# Altium PCB Tray2.PcbDoc (part 3 of 6)
Units mil, origin at the board's own origin, x right, y up, seen from the top; angles counter-clockwise.
Board outline 6000 x 4000 mil, 2 copper layers (Top Layer, Bottom Layer); 418 components, 415 nets, 1799 pads, 870 vias.
Unrouted connection lines stored in the file: 363.
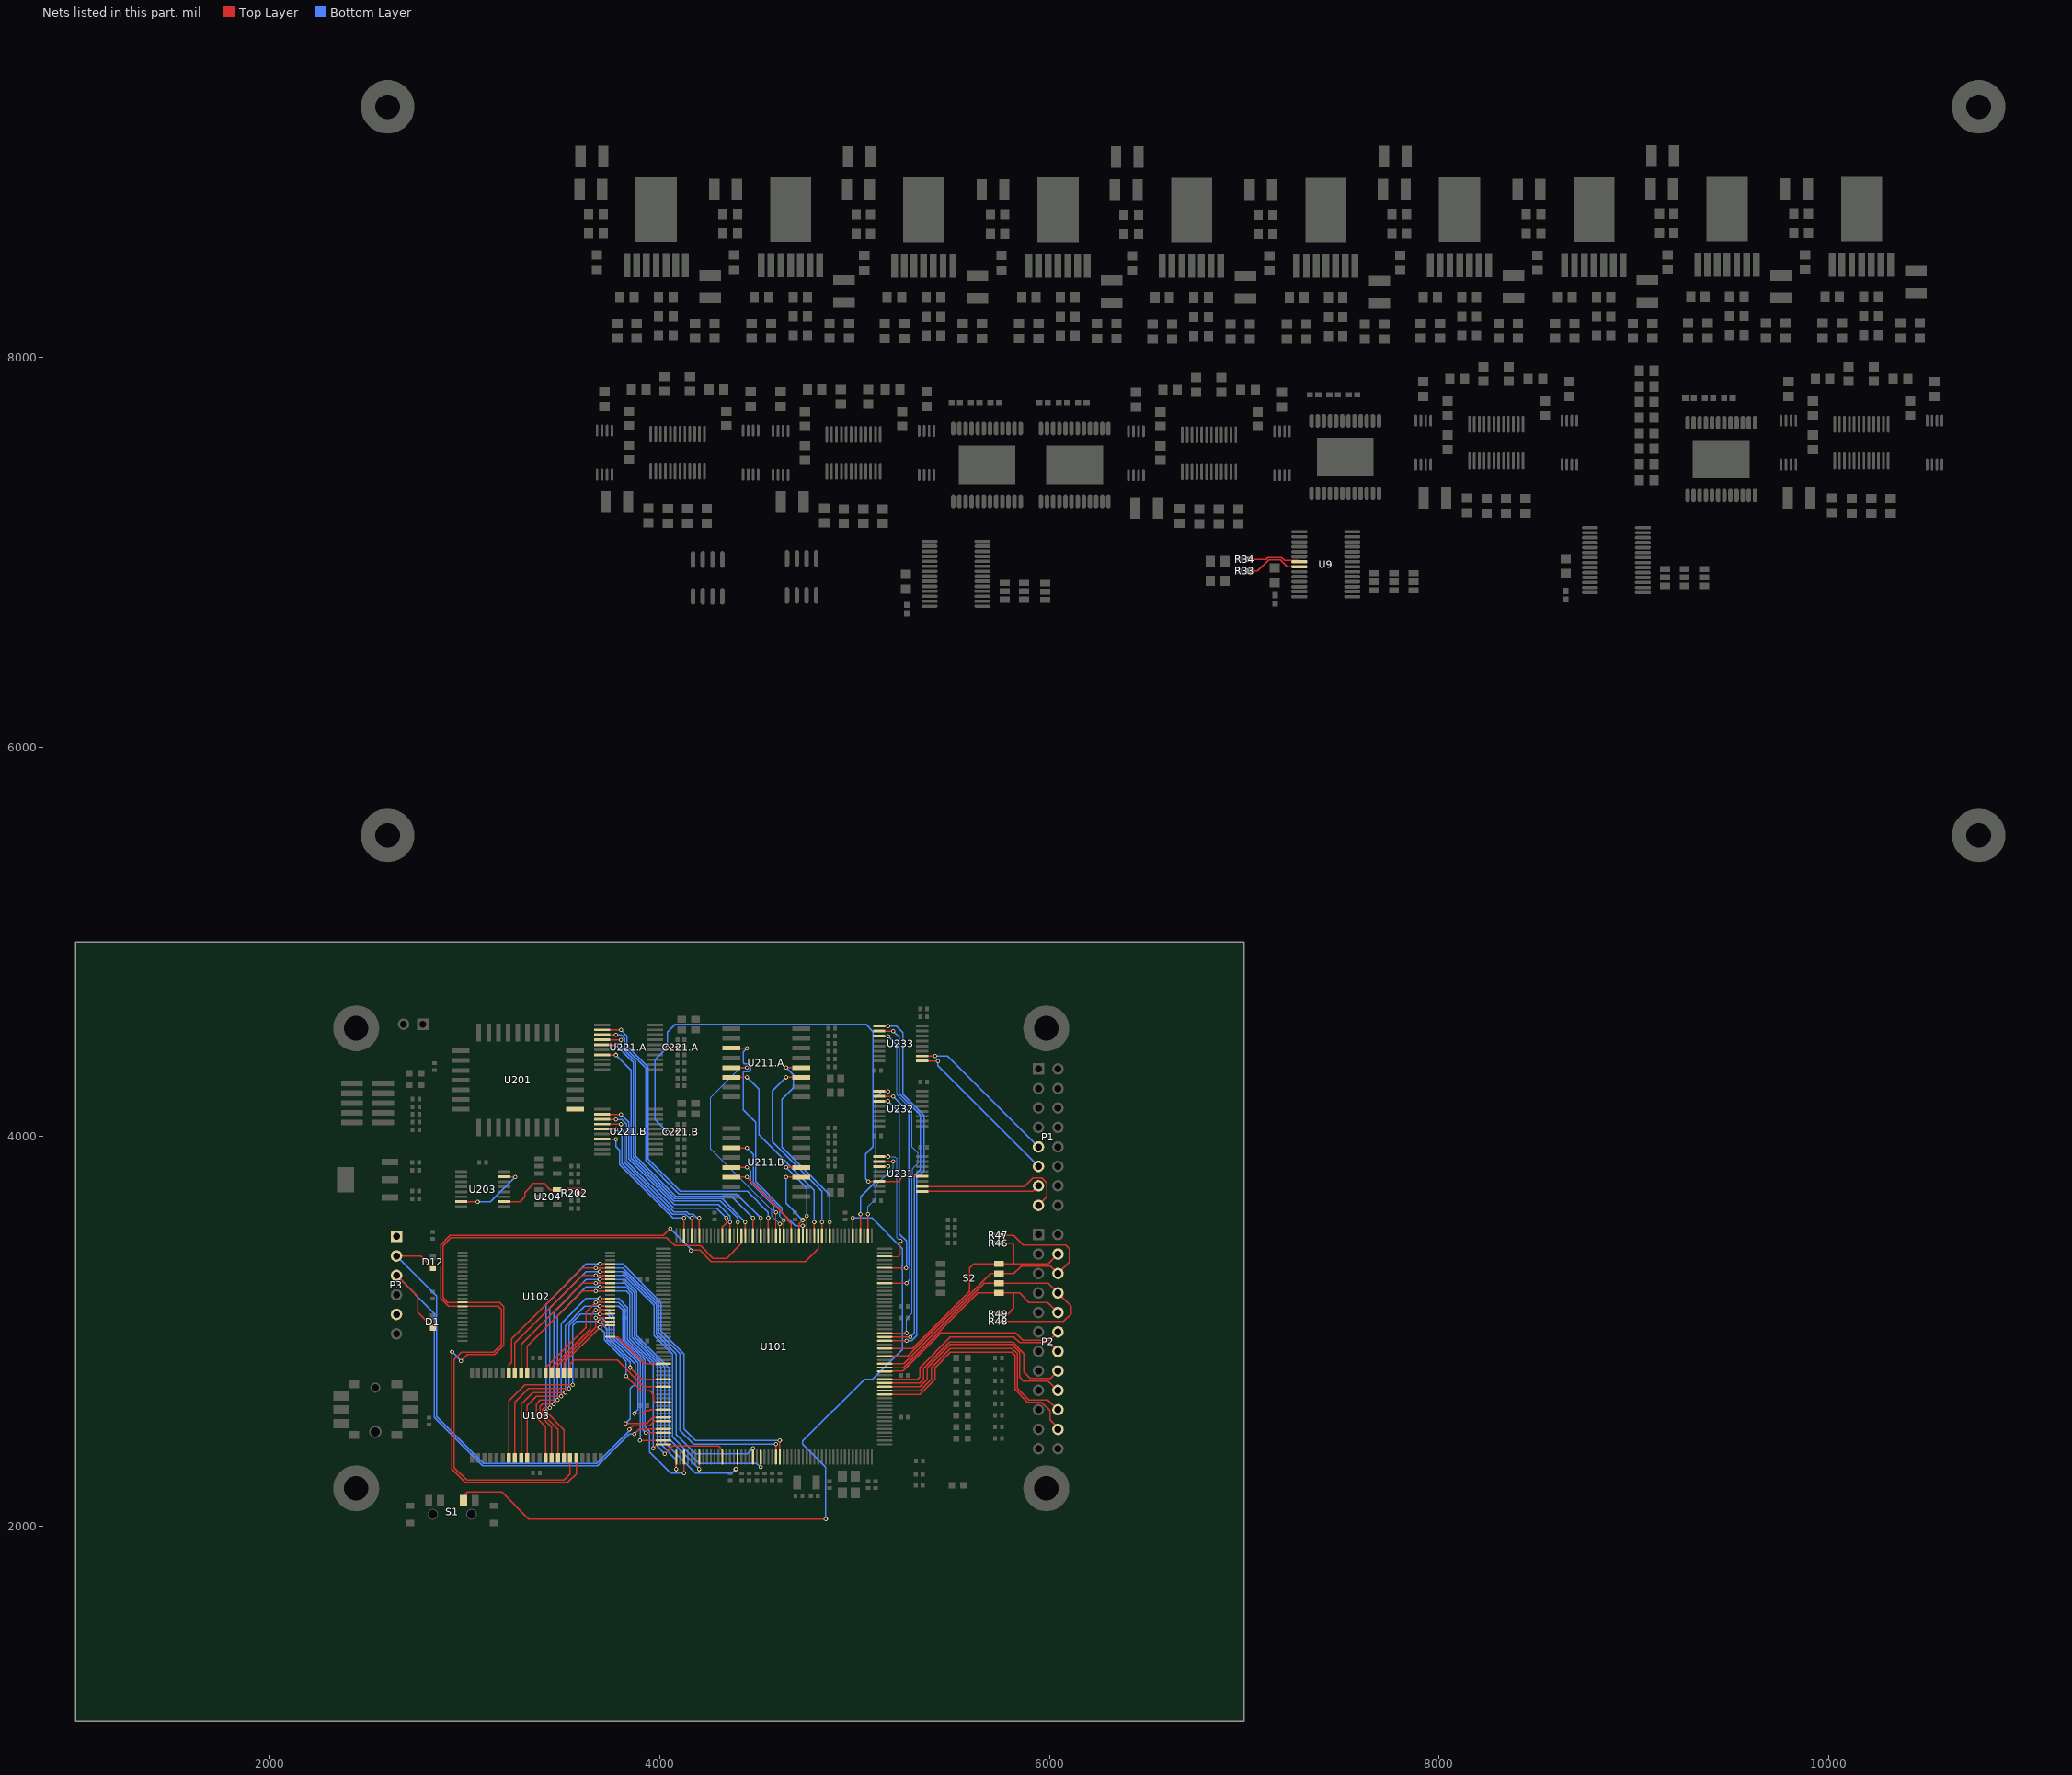
[diagram p3: the nets of this part, all layers, seen from the top]

## Via types
v1: diameter 21.65, hole 11.81, Top Layer to Bottom Layer, tented both sides, 370 vias
v2: diameter 27.56, hole 11.81, Top Layer to Bottom Layer, tented both sides, 231 vias
v3: diameter 27.56, hole 11.81, Top Layer to Bottom Layer, tented bottom, 120 vias
v4: diameter 25.98, hole 12.99, Top Layer to Bottom Layer, tented both sides, 96 vias
v5: diameter 50, hole 28, Top Layer to Bottom Layer, tented both sides, 40 vias
v6: diameter 21.65, hole 13.78, Top Layer to Bottom Layer, 13 vias

## Nets (pads, with @x,y where several pads share a name; then routed paths per layer and width w, separated by ;. In a path a pad name is that pad's centre, name@x,y a point inside that pad or via, vN(x,y) a via of type N, cw(c..) or ccw(c..) an arc to the next point about the centre after c; other vN are vias at no path point) (continued)
BLS0: U101.119 U102.15 U103.39 | length 4476.4
  Top Layer w5.91: U103.39@3539.45,2349.53 3539.45,2267.83 3507.95,2236.34 3008.94,2236.34 2943.98,2301.3 2943.98,2854.45 2982.36,2892.83 3145.81,2892.83 3157.56,2904.59 3157.56,2905.54 3186.1,2934.09 3186.1,3112.32 3169.37,3129.06 U102.15@2987.28,3129.06 2914.26,3129.06 2874.09,3169.22 2874.09,3444.02 2922.32,3492.24 4016.81,3492.24 v1(4053.23,3528.66) ; v1(4159.53,3415.47) 4160.51,3416.46 4206.04,3416.46 4263.12,3359.37 4748.11,3359.37 4813.07,3424.33 U101.119@4813.07,3490.28
  Bottom Layer w5.91: v1(4053.23,3528.66) 4159.53,3422.36 v1(4159.53,3415.47)
BLS1: U101.139 U102.14 U103.40 | length 4145.4
  Top Layer w5.91: v1(2933.15,2894.8) 2932.17,2893.82 2932.17,2293.43 3001.06,2224.53 3527.64,2224.53 3570.94,2267.83 U103.40@3570.94,2349.53 ; v1(2979.41,2848.54) 3011.89,2881.02 3150.7,2881.02 3169.37,2899.7 3169.37,2900.65 3197.91,2929.19 3197.91,3127.09 3176.26,3148.74 U102.14@2987.28,3148.74 2911.27,3148.74 2885.91,3174.11 2885.91,3439.12 2927.22,3480.43 4035.51,3480.43 4075.87,3440.08 4208.46,3440.08 4273.42,3375.12 4289.73,3375.12 4342.6,3375.12 4419.37,3451.89 U101.139@4419.37,3490.28
  Bottom Layer w5.91: v1(2933.15,2894.8) v1(2979.41,2848.54)
CLR: U201.14 U203.7 U203.15 | length 385.7
  Top Layer w5.91: U203.15@2980.39,3665.47 v1(3065.04,3665.47) ; U203.7@3200.87,3793.43 v1(3256.97,3793.43)
  Bottom Layer w5.91: v1(3065.04,3665.47) 3129.02,3665.47 v1(3256.97,3793.43)
CONTROL.AFSK1.DET: U101.120 U211.A.14 | length 1036.3
  Top Layer w5.91: U211.A.14@4368.19,4304.06 v1(4447.32,4304.06) ; U101.120@4793.39,3490.28 v1(4793.39,3562.13)
  Bottom Layer w5.91: v1(4447.32,4304.06) 4507.95,4243.43 4507.95,4009.45 4793.39,3724.02 v1(4793.39,3562.13)
CONTROL.AFSK1.M0: U101.118 U211.A.3 | length 1028.1
  Top Layer w5.91: v1(4647.32,4304.06) U211.A.3@4726.46,4304.06 ; U101.118@4832.76,3490.28 v1(4832.76,3562.13)
  Bottom Layer w5.91: v1(4647.32,4304.06) 4576.85,4233.58 4576.85,3975.51 4832.76,3719.61 v1(4832.76,3562.13)
CONTROL.AFSK1.M1: U101.116 U211.A.4 | length 1085
  Top Layer w5.91: v1(4647.32,4354.06) U211.A.4@4726.46,4354.06 ; U101.116@4872.13,3490.28 v1(4872.13,3562.13)
  Bottom Layer w5.91: v1(4647.32,4354.06) 4685.12,4316.26 4685.12,4251.1 4626.06,4192.05 4626.06,3945.98 4872.13,3699.92 v1(4872.13,3562.13)
CONTROL.AFSK1.RXD: U101.129 U211.A.13 | length 1186
  Top Layer w5.51: U101.129@4616.22,3490.28 v1(4616.22,3552.28)
  Top Layer w5.91: U211.A.13@4368.19,4354.06 v1(4447.32,4354.06)
  Bottom Layer w5.51: v1(4447.32,4354.06) 4414.06,4354.06 4261.89,4201.89 4261.89,3936.14 4575.28,3622.76 4575.28,3593.23 v1(4616.22,3552.28)
CONTROL.AFSK1.TXD: U101.123 U211.A.11 | length 1262.4
  Top Layer w5.91: U211.A.11@4368.19,4454.06 v1(4447.32,4454.06) ; U101.123@4734.33,3490.28 v1(4734.33,3542.44)
  Bottom Layer w5.91: v1(4447.32,4454.06) 4427.64,4434.37 4427.64,4380.44 4434.34,4373.74 4455.48,4373.74 4467.01,4362.21 4467.01,4345.9 4455.48,4334.37 4429.95,4334.37 4427.64,4332.06 4427.64,4295.9 4429.21,4294.33 4429.21,4213.78 4427.64,4212.21 4427.64,4137.69 4492.01,4073.32 4492.01,3768.68 4628.03,3632.66 4628.03,3609.37 4694.96,3542.44 v1(4734.33,3542.44)
CONTROL.AFSK2.DET: U101.126 U211.B.14 | length 475.5
  Top Layer w5.91: U211.B.14@4368.19,3792.24 v1(4447.32,3792.24) 4447.32,3790.08 4655.59,3581.81 4655.59,3571.97 4675.28,3552.28 U101.126@4675.28,3490.28
CONTROL.AFSK2.M0: U101.124 U211.B.3 | length 425.3
  Top Layer w5.91: v1(4647.32,3792.24) U211.B.3@4726.46,3792.24 ; U101.124@4714.65,3490.28 4714.65,3552.28 v1(4734.33,3571.97)
  Bottom Layer w5.91: v1(4647.32,3792.24) 4647.32,3658.98 v1(4734.33,3571.97)
CONTROL.AFSK2.M1: U101.122 U211.B.4 | length 475.3
  Top Layer w5.91: v1(4647.32,3842.24) U211.B.4@4726.46,3842.24 ; U101.122@4754.02,3490.28 v1(4754.02,3591.65)
  Bottom Layer w5.91: v1(4647.32,3842.24) 4754.02,3735.55 v1(4754.02,3591.65)
CONTROL.AFSK2.RXD: U101.130 U211.B.13 | length 492.9
  Top Layer w5.51: U101.130@4596.54,3490.28 v1(4596.54,3611.34)
  Top Layer w5.91: U211.B.13@4368.19,3842.24 v1(4447.32,3842.24)
  Bottom Layer w5.51: v1(4447.32,3842.24) 4468.58,3820.98 4468.58,3758.98 4586.69,3640.87 4586.69,3621.18 v1(4596.54,3611.34)
CONTROL.AFSK2.TXD: U101.128 U211.B.11 | length 599.9
  Top Layer w5.51: U101.128@4635.91,3490.28 v1@4635.91,3562.14
  Top Layer w5.91: U211.B.11@4368.19,3942.24 v1(4447.32,3942.24)
  Bottom Layer w5.51: 4616.02,3591.45 v1(4635.91,3571.57)
  Bottom Layer w5.91: v1(4447.32,3942.24) 4480.2,3909.37 4480.2,3763.79 4616.22,3627.76 4616.22,3603.18 4616.02,3602.99 4616.02,3591.45
CONTROL.DTMF1.Q1: U101.132 U221.A.12 | length 1644.2
  Top Layer w5.91: U221.A.12@3728.43,4547.36 v1(3800.28,4547.36) ; U101.132@4557.17,3490.28 v1(4557.17,3581.81)
  Bottom Layer w5.91: v1(3800.28,4547.36) 3831.77,4515.87 3831.77,4464.69 3939.06,4357.4 3939.06,3884.96 4104.41,3719.61 4448.9,3719.61 4557.17,3611.34 v1(4557.17,3581.81)
CONTROL.DTMF1.Q2: U101.134 U221.A.13 | length 1575.8
  Top Layer w5.91: U221.A.13@3728.43,4521.77 v1(3774.68,4521.77) ; U101.134@4517.8,3490.28 v1(4517.8,3581.81)
  Bottom Layer w5.91: v1(3774.68,4521.77) 3804.21,4521.77 3804.21,4520.08 3819.96,4504.34 3819.96,4458.72 3927.24,4351.44 3927.24,3877.09 4098.5,3705.83 4393.78,3705.83 v1(4517.8,3581.81)
CONTROL.DTMF1.Q3: U101.136 U221.A.14 | length 1525.3
  Top Layer w5.91: U221.A.14@3728.43,4496.18 v1(3800.28,4496.18) ; U101.136@4478.43,3490.28 v1(4478.43,3581.81)
  Bottom Layer w5.91: v1(3800.28,4496.18) 3800.28,4461.7 3877.05,4384.93 3877.05,3898.65 4081.68,3694.02 4366.22,3694.02 v1(4478.43,3581.81)
CONTROL.DTMF1.Q4: U101.138 U221.A.15 | length 1443.6
  Top Layer w5.91: U221.A.15@3728.43,4470.59 v1(3774.68,4470.59) ; U101.138@4439.06,3490.28 v1(4439.06,3562.13)
  Bottom Layer w5.91: v1(3774.68,4470.59) 3865.24,4380.04 3865.24,3893.76 4076.79,3682.2 4318.98,3682.2 v1(4439.06,3562.13)
CONTROL.DTMF1.STD: U101.140 U221.A.17 | length 1374.4
  Top Layer w5.91: U221.A.17@3728.43,4419.41 v1(3774.68,4419.41) ; U101.140@4399.69,3490.28 v1(4399.69,3562.13)
  Bottom Layer w5.91: v1(3774.68,4419.41) 3853.43,4340.67 3853.43,3888.87 4071.9,3670.39 4311.1,3670.39 4399.69,3581.81 v1(4399.69,3562.13)
CONTROL.DTMF2.Q1: U101.142 U221.B.12 | length 1060.5
  Top Layer w5.91: U221.B.12@3728.43,4114.29 v1(3800.28,4114.29) ; U101.142@4360.31,3490.28 v1(4360.31,3562.13)
  Bottom Layer w5.91: v1(3800.28,4114.29) 3841.61,4072.95 3841.61,3883.98 4074.88,3650.71 4301.26,3650.71 4360.31,3591.65 v1(4360.31,3562.13)
CONTROL.DTMF2.Q2: U101.144 U221.B.13 | length 1033.1
  Top Layer w5.91: U221.B.13@3728.43,4088.7 v1(3774.68,4088.7) ; U101.144@4320.94,3490.28 4320.94,3534.29 4340.63,3553.97 v1(4340.63,3581.81)
  Bottom Layer w5.91: v1(3774.68,4088.7) 3804.21,4088.7 3829.8,4063.11 3829.8,3873.12 4071.9,3631.02 4291.42,3631.02 v1(4340.63,3581.81)
CONTROL.DTMF2.Q3: U101.150 U221.B.14 | length 869.1
  Top Layer w5.91: U221.B.14@3728.43,4063.11 v1(3800.28,4063.11) ; U101.150@4202.83,3490.28 v1(4202.83,3581.81)
  Bottom Layer w5.91: v1(3800.28,4063.11) 3800.28,4039.46 3817.99,4021.74 3817.99,3868.23 4072.91,3613.31 4137.14,3613.31 4148.95,3601.5 4171.62,3601.5 4191.3,3581.81 v1(4202.83,3581.81)
CONTROL.DTMF2.Q4: U101.152 U221.B.15 | length 800.7
  Top Layer w5.91: U221.B.15@3728.43,4037.52 v1(3774.68,4037.52) ; U101.152@4163.46,3490.28 v1(4163.46,3581.81)
  Bottom Layer w5.91: v1(3774.68,4037.52) 3806.18,4006.02 3806.18,3860.35 4065.04,3601.5 4132.25,3601.5 4151.93,3581.81 v1(4163.46,3581.81)
CONTROL.DTMF2.STD: U101.154 U221.B.17 | length 719.9
  Top Layer w5.91: U221.B.17@3728.43,3986.34 v1(3774.68,3986.34) ; U101.154@4124.09,3490.28 v1(4124.09,3581.81)
  Bottom Layer w5.91: v1(3774.68,3986.34) 3774.68,3948.94 3794.37,3929.25 3794.37,3855.46 4068.02,3581.81 v1(4124.09,3581.81)
CONTROL.SWC0: U101.108 U231.11 U232.9 | length 977.3
  Top Layer w5.91: U101.108@5029.61,3490.28 5029.61,3581.81 v1(5029.61,3601.5) ; U231.11@5126.06,3846.57 v1(5172.32,3846.57) ; U232.9@5126.06,4232.4 v1(5172.32,4232.4)
  Bottom Layer w5.91: v1(5029.61,3601.5) 5029.61,3690.08 5108.35,3768.82 5108.35,3846.57 ; v1(5172.32,3846.57) 5108.35,3846.57 ; v1(5172.32,4232.4) 5138.86,4232.4 5108.35,4201.89 5108.35,3846.57
CONTROL.SWC1: U101.106 U231.10 | length 507.1
  Top Layer w5.91: U101.106@5068.98,3490.28 v1(5068.98,3601.5) ; U231.10@5126.06,3872.17 v1(5197.91,3872.17)
  Bottom Layer w5.51: v1(5068.98,3601.5) 5068.98,3640.87 5108.35,3680.24 5108.35,3749.13 5197.91,3838.7 v1(5197.91,3872.17)
CONTROL.SWC2: U101.102 U231.9 | length 680
  Top Layer w5.51: U101.102@5154.61,3384.96 5154.8,3385.16 5224.69,3385.16 5236.1,3396.57 v1(5236.1,3463.5) v1@5236.3,3463.7
  Top Layer w5.91: U231.9@5126.06,3897.76 v1(5172.32,3897.76)
  Bottom Layer w5.51: v1(5172.32,3897.76) 5205.79,3897.76 5217.4,3886.14 5217.4,3482.2 v1(5236.1,3463.5)
CONTROL.SWC3: U101.99 U232.11 | length 1055.2
  Top Layer w5.91: U232.11@5126.06,4181.22 v1(5172.32,4181.22) ; U101.99@5154.61,3325.91 5265.83,3325.91 5265.76,3325.97 v1(5264.01,3325.97)
  Bottom Layer w5.91: v1(5172.32,4181.22) 5229.02,4124.53 5229.02,3500.51 5265.83,3463.7 5265.83,3325.91 5265.76,3325.97 v1(5264.01,3325.97)
CONTROL.SWC4: U101.95 U232.10 | length 1185.9
  Top Layer w5.91: U232.10@5126.06,4206.81 v1(5197.91,4206.81) ; U101.95@5154.61,3247.17 v1(5265.83,3247.17)
  Bottom Layer w5.91: v1(5197.91,4206.81) 5277.64,4127.09 5277.64,3341.93 5283.94,3335.63 5283.94,3265.28 v1(5265.83,3247.17)
CONTROL.SWC5: U101.82 U233.11 | length 1771.2
  Top Layer w5.51: U101.82@5154.61,2991.26 5255.98,2991.26 v1(5265.83,2991.26)
  Top Layer w5.91: U233.11@5126.06,4515.87 v1(5172.32,4515.87)
  Bottom Layer w5.51: 5217.4,4470.79 5217.4,4214.88 5295.35,4136.93 5295.35,3945.98 5324.88,3916.46 5324.88,3862.91 5295.35,3833.39 5297.13,3831.61 5297.13,3799.78 5295.55,3798.21 5295.55,3093.82 5265.83,3064.09 v1(5265.83,2991.26)
  Bottom Layer w5.91: v1(5172.32,4515.87) 5217.4,4470.79
CONTROL.SWC6: U101.81 U233.10 | length 1851.3
  Top Layer w5.91: U233.10@5126.06,4541.46 v1(5197.91,4541.46) ; U101.81@5154.61,2971.57 v1(5285.51,2971.57)
  Bottom Layer w5.91: v1(5197.91,4541.46) 5229.21,4510.16 5229.21,4465.7 5229.02,4465.5 5229.02,4219.69 5336.5,4112.21 5336.5,3830.35 5308.74,3802.59 5308.74,3794.97 5307.17,3793.4 5307.17,2993.23 v1(5285.51,2971.57)
CONTROL.SWC7: U101.80 U233.9 | length 1926.7
  Top Layer w5.91: U233.9@5126.06,4567.05 v1(5172.32,4567.05) ; U101.80@5154.61,2951.89 v1(5265.83,2951.89)
  Bottom Layer w5.91: v1(5172.32,4567.05) 5214.65,4567.05 5247.13,4534.57 5247.13,4218.29 5355.39,4110.02 5355.39,3824.92 5318.98,3788.5 5318.98,2977.2 5293.67,2951.89 v1(5265.83,2951.89)
COUNTER_CLK: R202.1 U203.2 U204.5 | length 514.7
  Top Layer w5.91: U203.2@3200.87,3665.47 3282.56,3665.47 3307.17,3690.08 3307.17,3713.61 3334.61,3741.05 3334.61,3743.11 3350.47,3758.98 3405.59,3758.98 3437.09,3727.48 U204.5@3472.52,3727.48 3517.8,3727.48 3523.7,3733.39 3598.5,3733.39 3606.38,3725.51 3606.38,3717.64 3598.5,3709.76 R202.1@3580.79,3709.76
CS0: U101.187 U102.26 | length 330.7
  Top Layer w5.91: U102.26@3745.16,2971.57 3783.54,2971.57 3921.34,2833.78 U101.187@4018.78,2833.78
CS1: U101.193 U103.6 | length 589.8
  Top Layer w5.91: U103.6@3539.45,2786.54 3539.45,2831.81 3560.12,2852.48 3780.59,2852.48 3917.4,2715.67 U101.193@4018.78,2715.67
D0: U101.197 U102.29 U103.7 | length 953.2
  Top Layer w5.91: U103.7@3507.95,2786.54 3507.95,2837.72 v1(3691.02,3020.79) 3700.87,3030.63 U102.29@3745.16,3030.63 ; v1(3826.85,2770.79) 3903.62,2694.02 3948.9,2694.02 3968.58,2674.33 3968.58,2642.83 3974.49,2636.93 U101.197@4018.78,2636.93
  Bottom Layer w5.91: v1(3691.02,3020.79) 3697.44,3027.2 3697.44,3014.38 3716.61,2995.2 3716.61,2955.89 3826.85,2845.65 v1(3826.85,2770.79)
D1: U101.201 U102.31 U103.8 | length 1318
  Top Layer w5.91: U103.8@3476.46,2786.54 3476.46,2825.91 3671.34,3020.79 v1(3671.34,3070) U102.31@3745.16,3070 ; v1(3823.7,2526.69) 3932.17,2526.69 3963.66,2558.19 U101.201@4018.78,2558.19
  Bottom Layer w5.91: v1(3671.34,3070) 3700.87,3070 3740.24,3030.63 3740.24,2965.67 3874.09,2831.81 3874.09,2731.42 3848.5,2705.83 3848.5,2551.5 v1(3823.7,2526.69) v1@3819.17,2522.17
D2: U101.207 U102.33 U103.9 | length 1410.8
  Top Layer w5.91: U103.9@3444.96,2786.54 3444.96,2814.09 3641.81,3010.95 3641.81,3079.84 v1(3671.34,3109.37) U102.33@3745.16,3109.37 ; v1(3897.72,2440.08) U101.207@4018.78,2440.08
  Bottom Layer w5.91: v1(3671.34,3109.37) 3730.39,3109.37 3766.06,3073.7 3766.06,2976.47 3899.68,2842.84 3899.68,2442.05 v1(3897.72,2440.08)
D3: U101.3 U102.35 U103.10 | length 1797.6
  Top Layer w5.91: U103.10@3413.46,2786.54 3413.46,2812.13 3622.13,3020.79 3622.13,3099.53 v1(3671.34,3148.74) U102.35@3745.16,3148.74 ; v1(4124.09,2272.76) U101.3@4124.09,2354.45
  Bottom Layer w5.91: v1(3671.34,3148.74) 3789.45,3148.74 3822.91,3115.28 3822.91,2953.02 3923.31,2852.63 3923.31,2511.22 3946.93,2487.6 3946.93,2381.02 4055.2,2272.76 v1(4124.09,2272.76)
D4: U101.13 U102.38 U103.13 | length 2113.2
  Top Layer w5.91: U103.13@3318.98,2786.54 3318.98,2924.33 3602.44,3207.8 v1(3671.34,3207.8) U102.38@3745.16,3207.8 ; v1(4025.67,2371.18) 4065.04,2410.55 4301.26,2410.55 4320.94,2390.87 U101.13@4320.94,2354.45
  Bottom Layer w5.91: v1(3671.34,3207.8) 3828.82,3207.8 3846.54,3190.08 3846.54,2962.8 3986.3,2823.04 3986.3,2410.55 v1(4025.67,2371.18)
D5: U101.17 U102.40 U103.14 | length 2289.9
  Top Layer w5.91: U103.14@3287.48,2786.54 3287.48,2932.2 3602.44,3247.17 v1(3671.34,3247.17) U102.40@3745.16,3247.17 ; v1(4389.84,2292.44) 4399.69,2302.28 U101.17@4399.69,2354.45
  Bottom Layer w5.91: v1(3671.34,3247.17) 3822.86,3247.17 3870.16,3199.86 3870.16,2972.59 4025.67,2817.08 4025.67,2430.24 4183.15,2272.76 4370.16,2272.76 v1(4389.84,2292.44)
D6: U101.23 U102.42 U103.15 | length 2431.5
  Top Layer w5.91: U103.15@3255.98,2786.54 3255.98,2940.08 3602.44,3286.54 3699.18,3286.54 U102.42@3745.16,3286.54 ; v1(4517.8,2302.28) U101.23@4517.8,2354.45
  Bottom Layer w5.91: v1(3671.34,3286.54) 3816.89,3286.54 3970.55,3132.88 3970.55,2977.48 4065.04,2882.99 4065.04,2459.76 4202.83,2321.97 4498.11,2321.97 v1(4517.8,2302.28)
D7: U101.27 U102.44 U103.16 | length 2523
  Top Layer w5.91: U103.16@3224.49,2786.54 3224.49,2826.89 3238.27,2840.67 3238.27,2961.73 3602.44,3325.91 v1(3671.34,3325.91) U102.44@3745.16,3325.91 ; U101.27@4596.54,2354.45 v1(4596.54,2420.39)
  Bottom Layer w5.91: v1(3671.34,3325.91) 3810.93,3325.91 3994.17,3142.66 3994.17,2993.23 4102.44,2884.96 4102.44,2491.26 4173.31,2420.39 v1(4596.54,2420.39)
D8: U101.191 U102.30 U103.29 | length 1645.9
  Top Layer w5.91: U103.29@3224.49,2349.53 3224.49,2642.83 3307.17,2725.51 v1(3553.23,2725.51) ; v1(3691.02,3050.32) U102.30@3745.16,3050.32 ; v1(3848.5,2814.09) 3907.56,2755.04 U101.191@4018.78,2755.04
  Bottom Layer w5.91: v1(3553.23,2725.51) 3553.23,3030.63 3572.91,3050.32 v1(3691.02,3050.32) 3728.43,3012.91 3728.43,2960.78 3848.5,2840.7 3848.5,2825.9
D9: U101.199 U102.32 U103.30 | length 1936.5
  Top Layer w5.91: U103.30@3255.98,2349.53 3255.98,2634.96 3326.85,2705.83 v1(3533.54,2705.83) ; v1(3691.02,3089.69) U102.32@3745.16,3089.69 ; v1(3868.19,2577.87) 3912.48,2577.87 3927.24,2592.64 3946.93,2592.64 3951.85,2597.56 U101.199@4018.78,2597.56
  Bottom Layer w5.91: v1(3533.54,2705.83) 3533.54,3030.63 3592.6,3089.69 v1(3691.02,3089.69) 3730.39,3089.69 3754.25,3065.83 3754.25,2971.57 3887.87,2837.95 3887.87,2597.56 v1(3868.19,2577.87)
D10: U101.205 U102.34 U103.31 | length 2039.9
  Top Layer w5.91: U103.31@3287.48,2349.53 3287.48,2627.09 3346.54,2686.14 v1(3513.86,2686.14) ; v1(3691.02,3129.06) U102.34@3745.16,3129.06 ; v1(3927.24,2479.45) U101.205@4018.78,2479.45
  Bottom Layer w5.91: v1(3513.86,2686.14) 3513.86,3027.65 3615.27,3129.06 v1(3691.02,3129.06) 3789.45,3129.06 3809.13,3109.37 3809.13,2950.1 3911.5,2847.73 3911.5,2495.2 v1(3927.24,2479.45)
D11: U101.208 U102.36 U103.32 | length 2142.3
  Top Layer w5.91: U103.32@3318.98,2349.53 3318.98,2619.21 3366.22,2666.46 v1(3494.17,2666.46) ; v1(3691.02,3168.43) U102.36@3745.16,3168.43 ; v1(3966.61,2400.71) 3986.3,2420.39 U101.208@4018.78,2420.39
  Bottom Layer w5.91: v1(3494.17,2666.46) 3494.17,3040.47 3622.13,3168.43 v1(3691.02,3168.43) 3789.45,3168.43 3834.72,3123.15 3834.72,2957.91 3966.61,2826.02 v1(3966.61,2400.71)
D12: U101.1 U102.39 U103.35 | length 2444.1
  Top Layer w5.91: U103.35@3413.46,2349.53 3413.46,2510.95 3366.22,2558.19 3366.22,2627.09 3385.91,2646.77 v1(3474.49,2646.77) ; v1(3691.02,3227.48) U102.39@3745.16,3227.48 ; v1(4084.72,2292.44) U101.1@4084.72,2354.45 U101.1@4084.72,2381.02
  Bottom Layer w5.91: v1(3474.49,2646.77) 3474.49,3079.84 3622.13,3227.48 v1(3691.02,3227.48) 3825.84,3227.48 3858.35,3194.97 3858.35,2967.7 4005.98,2820.06 4005.98,2420.39 4084.72,2341.65 v1(4084.72,2292.44)
D13: U101.7 U102.41 U103.36 | length 2522.8
  Top Layer w5.91: U103.36@3444.96,2349.53 3444.96,2508.98 3383.94,2570 3383.94,2615.28 3395.75,2627.09 v1(3454.8,2627.09) ; v1(3691.02,3266.85) U102.41@3745.16,3266.85 ; v1(4202.83,2292.44) U101.7@4202.83,2354.45
  Bottom Layer w5.91: v1(3454.8,2627.09) 3454.8,3099.53 3622.13,3266.85 v1(3691.02,3266.85) 3745.16,3266.85 3819.87,3266.85 3881.97,3204.76 3881.97,2977.48 4045.35,2814.09 4045.35,2449.92 v1(4202.83,2292.44)
D14: U101.21 U102.43 U103.37 | length 2788.9
  Top Layer w5.91: v1(3435.12,2607.4) 3405.59,2607.4 3395.75,2597.56 3395.75,2577.87 3476.46,2497.17 U103.37@3476.46,2349.53 ; v1(3691.02,3306.22) U102.43@3745.16,3306.22 ; U101.21@4478.43,2354.45 v1(4478.43,2400.71)
  Bottom Layer w5.91: v1(3435.12,2607.4) 3435.12,3119.21 3622.13,3306.22 v1(3691.02,3306.22) 3745.16,3306.22 3813.91,3306.22 3982.36,3137.77 3982.36,2985.35 4084.72,2882.99 4084.72,2469.61 4183.15,2371.18 4448.9,2371.18 v1(4478.43,2400.71)
D15: U101.28 U102.45 U103.38 | length 2940.3
  Top Layer w5.91: v1(3415.43,2587.72) 3507.95,2495.2 U103.38@3507.95,2349.53 ; v1(3691.02,3345.59) U102.45@3745.16,3345.59 ; U101.28@4616.22,2354.45 v1(4616.22,2440.08)
  Bottom Layer w5.91: v1(3415.43,2587.72) 3415.43,3138.9 3622.13,3345.59 v1(3691.02,3345.59) 3809.13,3345.59 4005.98,3148.74 4005.98,3001.1 4124.09,2882.99 4124.09,2499.13 4183.15,2440.08 v1(4616.22,2440.08)
DEBUG1: R33.1 U9.8 | length 297.4
  Top Layer w6: R33.1@7025.04,6903.74 7069.06,6903.74 7127.01,6961.69 7187.01,6961.69 7222.8,6925.91 U9.8@7283.62,6925.91
DEBUG2: R34.1 U9.7 | length 271.9
  Top Layer w6: R34.1@7025.04,6963.74 7112.09,6963.74 7122.04,6973.69 7191.98,6973.69 7206.44,6959.23 7275.89,6959.23 U9.7@7283.62,6951.5
DTMF_RX: C221.A.2 C221.B.2 U231.4 U231.14 | length 2831.3
  Top Layer w5.91: v1(4039.45,4024.72) C221.B.2@4090.63,4024.72 ; v1(4039.45,4457.8) C221.A.2@4090.63,4457.8 ; v1(5069.96,3769.8) U231.14@5126.06,3769.8 5223.5,3769.8 5249.09,3795.39 U231.4@5346.54,3795.39
  Bottom Layer w5.91: v1(4039.45,4024.72) 3976.46,4087.72 3976.46,4394.8 v1(4039.45,4457.8) 4039.45,4535.55 4079.8,4575.91 5059.13,4575.91 5095.55,4539.49 5095.55,3948.94 5057.17,3910.55 5057.17,3782.6 v1(5069.96,3769.8)
E\I\N\I\T\0\: S1.3 U101.110 | length 4047.2
  Top Layer w5.91: S1.3@2992.15,2121.17 S1.3@2992.15,2132.98 2992.15,2154.59 3012.87,2175.32 3188.07,2175.32 3326.85,2036.54 v1(4852.44,2036.54) ; U101.110@4990.24,3490.28 v1(4990.24,3581.81)
  Bottom Layer w5.91: v1(4852.44,2036.54) 4852.44,2303.97 4734.33,2422.08 4734.33,2438.39 5050.98,2755.04 5092.88,2755.04 5246.14,2908.3 5246.14,3316 5244.32,3317.82 5244.32,3334.12 5246.14,3335.95 5246.14,3424.33 5088.66,3581.81 v1(4990.24,3581.81)
EXT0: P2.4 R46.2 S2.8 U101.78 | length 1322.6
  Top Layer w5.91: U101.78@5154.61,2912.52 5297.44,2912.52 5590.63,3205.71 5590.63,3325.91 5612.09,3347.36 5817.01,3347.36 ; R46.2@5755.98,3453.86 5807.17,3453.86 5817.01,3444.02 5817.01,3347.36 ; P2.4@6044.17,3397.17 5994.17,3347.17 5965.16,3347.17 5964.97,3347.36 5817.01,3347.36
EXT1: P2.6 R47.2 S2.7 U101.76 | length 1623.5
  Top Layer w5.91: U101.76@5154.61,2873.15 5274.77,2873.15 5698.79,3297.17 S2.7@5740.63,3297.17 5817.8,3297.17 5856.18,3335.55 5960.07,3335.55 5960.27,3335.35 5999.07,3335.35 5999.26,3335.55 6005.79,3335.55 P2.6@6044.17,3297.17 6102.44,3355.43 6102.44,3424.33 6082.76,3444.02 5866.22,3444.02 5817.01,3493.23 R47.2@5755.98,3493.23
EXT2: P2.8 R48.2 S2.6 U101.74 | length 1589.8
  Top Layer w5.91: U101.74@5154.61,2833.78 5252.11,2833.78 5665.49,3247.17 S2.6@5740.63,3247.17 5994.17,3247.17 P2.8@6044.17,3197.17 6112.28,3129.06 6112.28,3089.69 6072.91,3050.32 R48.2@5755.98,3050.32
EXT3: P2.10 R49.2 S2.5 U101.73 | length 1240.9
  Top Layer w5.91: U101.73@5154.61,2814.09 5249.12,2814.09 5632.19,3197.17 S2.5@5740.63,3197.17 5817.01,3197.17 ; R49.2@5755.98,3089.69 5787.48,3089.69 5817.01,3119.21 5817.01,3197.17 ; P2.10@6044.17,3097.17 5992.6,3148.74 5895.75,3148.74 5847.32,3197.17 5817.01,3197.17
EXT4: P2.12 U101.72 | length 1004.5
  Top Layer w5.91: U101.72@5154.61,2794.41 5155.59,2795.39 5247.13,2795.39 5442.99,2991.26 5826.85,2991.26 5864.25,2953.86 6000.87,2953.86 P2.12@6044.17,2997.17
EXT5: P2.14 U101.70 | length 1039.7
  Top Layer w5.91: U101.70@5154.61,2755.04 5155.59,2754.06 5323.9,2754.06 5334.72,2764.88 5334.72,2814.09 5492.2,2971.57 5817.01,2971.57 5846.54,2942.05 5999.29,2942.05 P2.14@6044.17,2897.17
EXT6: P2.16 U101.69 | length 1157.4
  Top Layer w5.91: U101.69@5154.61,2735.35 5334.72,2735.35 5354.41,2755.04 5354.41,2811.11 5487.31,2944.02 5812.06,2944.02 5869.65,2886.42 5869.65,2790.98 5901.85,2758.78 6005.79,2758.78 P2.16@6044.17,2797.17
EXT7: P2.18 U101.68 | length 1186.2
  Top Layer w5.91: U101.68@5154.61,2715.67 5334.72,2715.67 5374.09,2755.04 5374.09,2814.09 5492.2,2932.2 5807.17,2932.2 5846.54,2892.83 5846.54,2764.88 5866.22,2745.2 5994.17,2745.2 6042.2,2697.17 P2.18@6044.17,2697.17
EXT8: P2.20 U101.67 | length 1248.3
  Top Layer w5.91: U101.67@5154.61,2695.98 5334.72,2695.98 5393.78,2755.04 5393.78,2814.09 5492.2,2912.52 5807.17,2912.52 5834.72,2884.96 5834.72,2707.8 5893.78,2648.74 5992.6,2648.74 P2.20@6044.17,2597.17
EXT9: P2.22 U101.66 | length 1311.6
  Top Layer w5.91: U101.66@5154.61,2676.3 5334.72,2676.3 5413.46,2755.04 5413.46,2814.09 5492.2,2892.83 5807.17,2892.83 5822.91,2877.09 5822.91,2702.9 5888.89,2636.93 5958.7,2636.93 6003.03,2592.59 6003.03,2546.35 6044.17,2505.21 P2.22@6044.17,2497.17
FTDI.CTS: P3.5
FTDI.DTR: P3.1
FTDI.RXI: D12.1 P3.2 U101.202 | length 2481
  Top Layer w5.91: P3.2@2647.72,3387.32 2773.31,3387.32 D12.1@2834.72,3325.91 ; v1(3844.17,2497.17) 3861.89,2514.88 3945.95,2514.88 3969.57,2538.5 U101.202@4018.78,2538.5
  Bottom Layer w5.91: P3.2@2647.72,3387.32 2854.41,3180.63 2854.41,2561.93 3094.17,2322.17 3676.43,2322.17 3844.17,2489.91 v1(3844.17,2497.17)
FTDI.TXO: D1.1 P3.3 U101.204 | length 2513.5
  Top Layer w5.91: P3.3@2647.72,3287.32 2755.98,3179.06 2755.98,3097.56 D1.1@2834.72,3018.82 ; v1(3869.17,2472.17) 3896.14,2499.13 3919.17,2499.13 U101.204@4018.78,2499.13
  Bottom Layer w5.91: P3.3@2647.72,3287.32 2842.6,3092.44 2842.6,2557.04 3089.28,2310.35 3681.32,2310.35 3843.13,2472.17 v1(3869.17,2472.17)
GMSK.RX1: P1.13 U231.1 | length 605.3
  Top Layer w5.91: U231.1@5346.54,3718.62 5915.63,3718.62 P1.13@5941.22,3744.21
GMSK.RX2: P1.15 U231.2 | length 802.7
  Top Layer w5.91: U231.2@5346.54,3744.21 5871.14,3744.21 5915.43,3788.5 5960.71,3788.5 5987.28,3761.93 5987.28,3690.28 P1.15@5944.17,3647.17
GMSK.TX1: P1.9 U233.2 | length 790.8
  Top Layer w5.91: U233.2@5346.54,4413.5 v1(5413.46,4413.5)
  Bottom Layer w5.91: v1(5413.46,4413.5) 5477.83,4413.5 P1.9@5944.17,3947.17
GMSK.TX2: P1.11 U233.1 | length 861
  Top Layer w5.91: U233.1@5346.54,4387.91 v1(5428.23,4387.91)
  Bottom Layer w5.91: v1(5428.23,4387.91) 5428.23,4363.11 P1.11@5944.17,3847.17 P1.11@5944.17,3871.97